# EAGLE board Tilt-A-Whirl_RPI-1031 Panel v12 (EAGLE 6.4), part 1 of 3
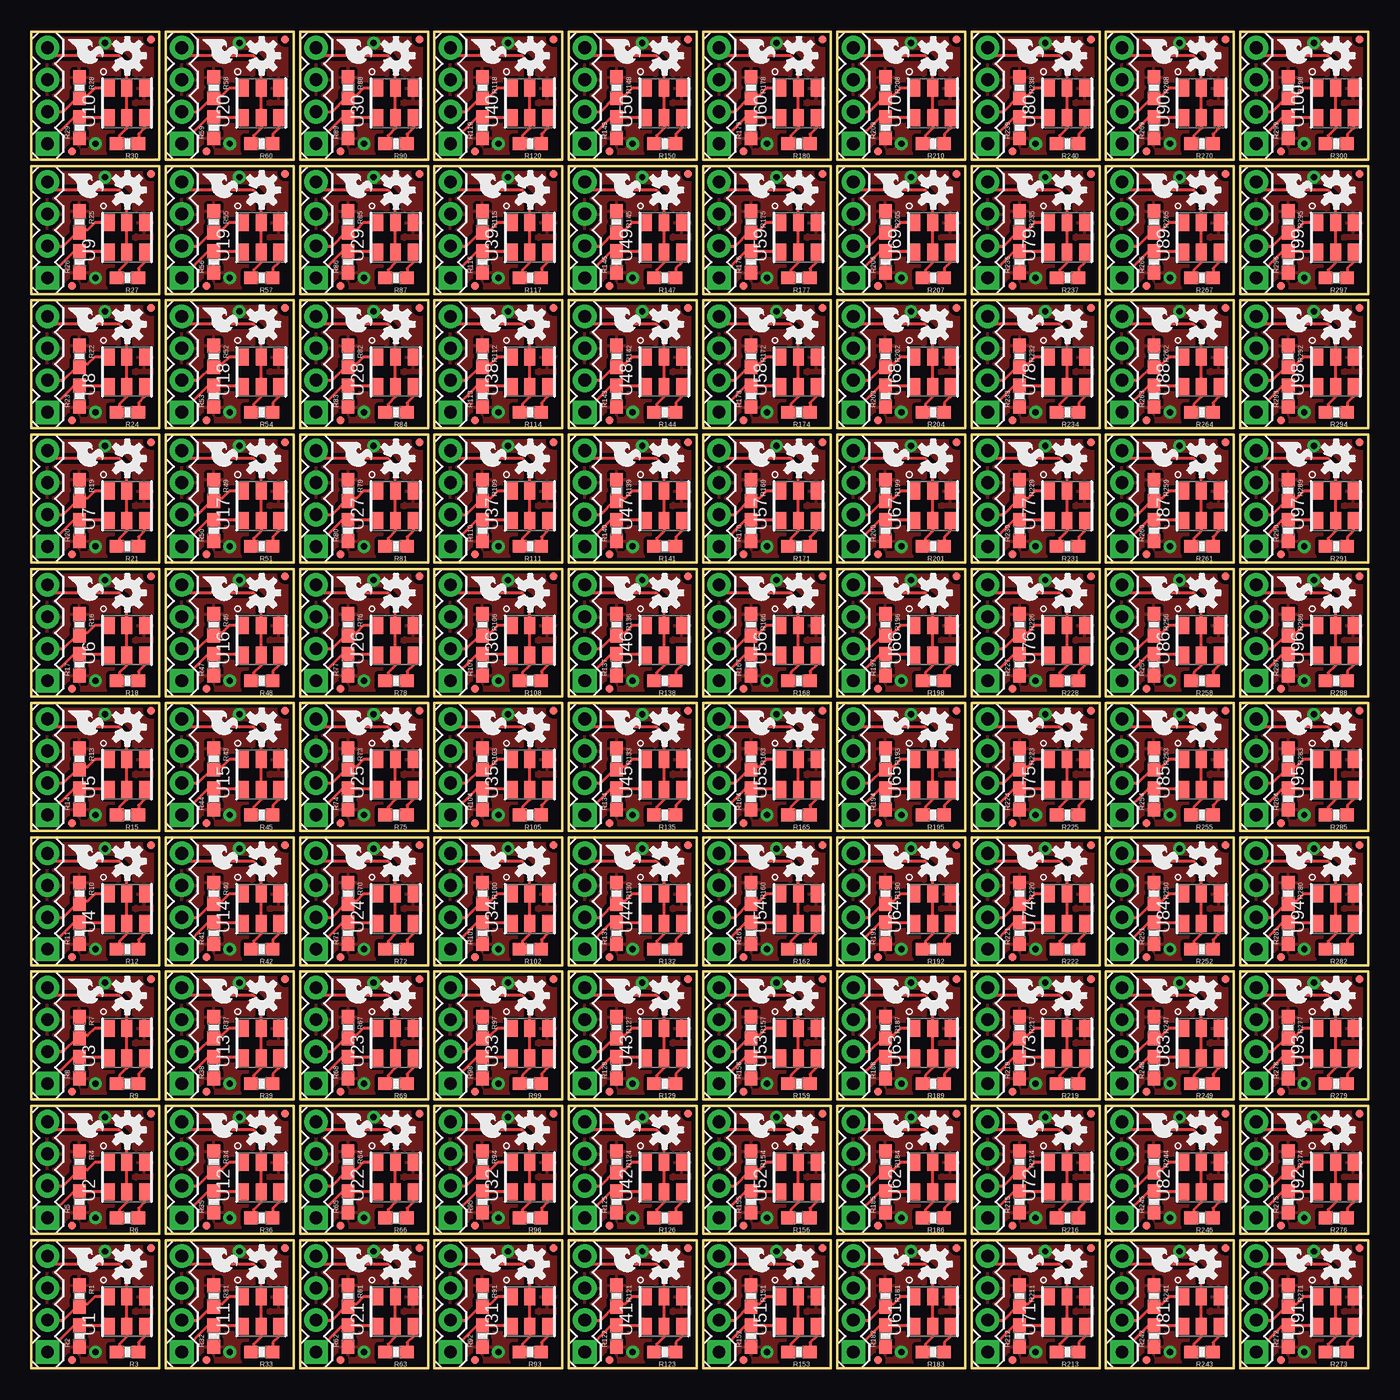
[diagram p0: board, top side]
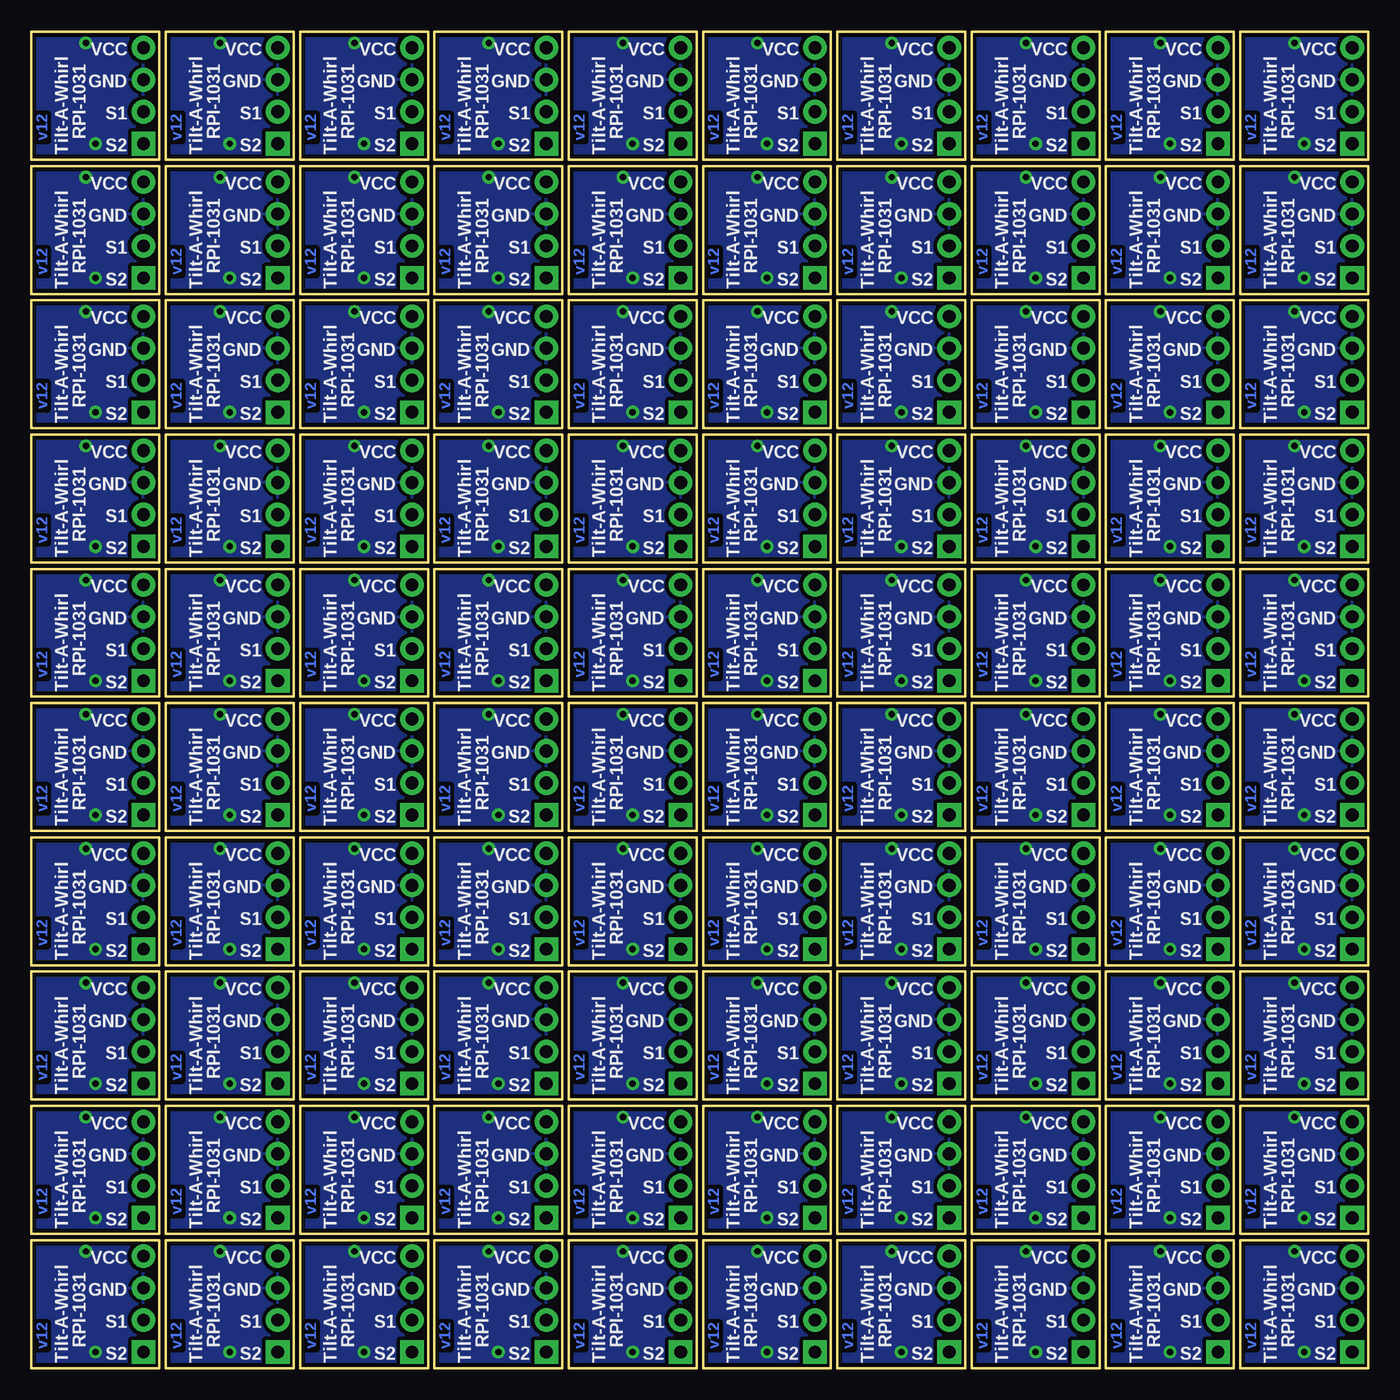
[diagram p1: board, bottom side, seen from below]

Size 106.17 x 106.17 mm. Coordinates in mm from the lower left corner, seen from the top.
Outline: 400 segments
Copper layers (1*16): Top 0.035mm / dielectric 1.5mm / Bottom 0.035mm
Design rules "SparkFun *": minimum track width 8mil, minimum drill 20mil, track to track 8mil, track to pad 8mil, pad to pad 8mil, via to via 8mil, smd to smd 8mil, copper to edge 8mil, drill to drill 8mil, minimum pad ring 12mil, minimum via ring 10mil, stop-mask expansion 4mil, vias tented up to drill 20mil, thermal gap 10mil

## Footprints (pad centres in the part's own frame; a part is rotated, then mirrored left to right if it is on the bottom)
1X04 = drill 1.016 pad 1.88 square: 1 0,0 | drill 1.016 pad 1.88: 2 2.54,0; 3 5.08,0; 4 7.62,0
FIDUCIAL-1X2.5 = smd 0.635 x 0.635: 1 0,0
0603-RES = smd 1.1 x 1: 1 -0.85,0; 2 0.85,0
RPI-1031 = smd 1.35 x 0.85: 1 1.22,1.445; 2 1.22,0.045; 3 1.22,-1.355; 4 -1.13,1.445; 5 -1.13,0.045; 6 -1.13,-1.355

## Placement (x,y rotation side)
JP1  [1X04]  1.27,1.27 90 top
JP2  FIDUCIAL1X2.5  [FIDUCIAL-1X2.5]  9.47,9.55 0 top
JP3  FIDUCIAL1X2.5  [FIDUCIAL-1X2.5]  3.23,0.64 0 top
JP4  LOGO-SFESK  [SFE-LOGO-FLAME]  2.92,9.53 270 top
JP5  LOGO-SFESK  [SFE-LOGO-FLAME]  2.92,20.19 270 top
JP6  [1X04]  1.27,11.94 90 top
JP7  FIDUCIAL1X2.5  [FIDUCIAL-1X2.5]  9.47,20.22 0 top
JP8  FIDUCIAL1X2.5  [FIDUCIAL-1X2.5]  3.23,11.3 0 top
JP9  LOGO-SFESK  [SFE-LOGO-FLAME]  2.92,30.86 270 top
JP10  [1X04]  1.27,22.61 90 top
JP11  FIDUCIAL1X2.5  [FIDUCIAL-1X2.5]  9.47,30.89 0 top
JP12  FIDUCIAL1X2.5  [FIDUCIAL-1X2.5]  3.23,21.97 0 top
JP13  LOGO-SFESK  [SFE-LOGO-FLAME]  2.92,41.53 270 top
JP14  [1X04]  1.27,33.27 90 top
JP15  FIDUCIAL1X2.5  [FIDUCIAL-1X2.5]  9.47,41.55 0 top
JP16  FIDUCIAL1X2.5  [FIDUCIAL-1X2.5]  3.23,32.64 0 top
JP17  LOGO-SFESK  [SFE-LOGO-FLAME]  2.92,52.2 270 top
JP18  [1X04]  1.27,43.94 90 top
JP19  FIDUCIAL1X2.5  [FIDUCIAL-1X2.5]  9.47,52.22 0 top
JP20  FIDUCIAL1X2.5  [FIDUCIAL-1X2.5]  3.23,43.31 0 top
JP21  LOGO-SFESK  [SFE-LOGO-FLAME]  2.92,62.87 270 top
JP22  [1X04]  1.27,54.61 90 top
JP23  FIDUCIAL1X2.5  [FIDUCIAL-1X2.5]  9.47,62.89 0 top
JP24  FIDUCIAL1X2.5  [FIDUCIAL-1X2.5]  3.23,53.98 0 top
JP25  LOGO-SFESK  [SFE-LOGO-FLAME]  2.92,73.53 270 top
JP26  [1X04]  1.27,65.28 90 top
JP27  FIDUCIAL1X2.5  [FIDUCIAL-1X2.5]  9.47,73.56 0 top
JP28  FIDUCIAL1X2.5  [FIDUCIAL-1X2.5]  3.23,64.64 0 top
JP29  LOGO-SFESK  [SFE-LOGO-FLAME]  2.92,84.2 270 top
JP30  [1X04]  1.27,75.95 90 top
JP31  FIDUCIAL1X2.5  [FIDUCIAL-1X2.5]  9.47,84.23 0 top
JP32  FIDUCIAL1X2.5  [FIDUCIAL-1X2.5]  3.23,75.31 0 top
JP33  LOGO-SFESK  [SFE-LOGO-FLAME]  2.92,94.87 270 top
JP34  [1X04]  1.27,86.61 90 top
JP35  FIDUCIAL1X2.5  [FIDUCIAL-1X2.5]  9.47,94.89 0 top
JP36  FIDUCIAL1X2.5  [FIDUCIAL-1X2.5]  3.23,85.98 0 top
JP37  LOGO-SFESK  [SFE-LOGO-FLAME]  2.92,105.54 270 top
JP38  [1X04]  1.27,97.28 90 top
JP39  FIDUCIAL1X2.5  [FIDUCIAL-1X2.5]  9.47,105.56 0 top
JP40  FIDUCIAL1X2.5  [FIDUCIAL-1X2.5]  3.23,96.65 0 top
JP41  LOGO-SFESK  [SFE-LOGO-FLAME]  13.59,9.53 270 top
JP42  [1X04]  11.94,1.27 90 top
JP43  FIDUCIAL1X2.5  [FIDUCIAL-1X2.5]  20.14,9.55 0 top
JP44  FIDUCIAL1X2.5  [FIDUCIAL-1X2.5]  13.89,0.64 0 top
JP45  LOGO-SFESK  [SFE-LOGO-FLAME]  13.59,20.19 270 top
JP46  [1X04]  11.94,11.94 90 top
JP47  FIDUCIAL1X2.5  [FIDUCIAL-1X2.5]  20.14,20.22 0 top
JP48  FIDUCIAL1X2.5  [FIDUCIAL-1X2.5]  13.89,11.3 0 top
JP49  LOGO-SFESK  [SFE-LOGO-FLAME]  13.59,30.86 270 top
JP50  [1X04]  11.94,22.61 90 top
JP51  FIDUCIAL1X2.5  [FIDUCIAL-1X2.5]  20.14,30.89 0 top
JP52  FIDUCIAL1X2.5  [FIDUCIAL-1X2.5]  13.89,21.97 0 top
JP53  LOGO-SFESK  [SFE-LOGO-FLAME]  13.59,41.53 270 top
JP54  [1X04]  11.94,33.27 90 top
JP55  FIDUCIAL1X2.5  [FIDUCIAL-1X2.5]  20.14,41.55 0 top
JP56  FIDUCIAL1X2.5  [FIDUCIAL-1X2.5]  13.89,32.64 0 top
JP57  LOGO-SFESK  [SFE-LOGO-FLAME]  13.59,52.2 270 top
JP58  [1X04]  11.94,43.94 90 top
JP59  FIDUCIAL1X2.5  [FIDUCIAL-1X2.5]  20.14,52.22 0 top
JP60  FIDUCIAL1X2.5  [FIDUCIAL-1X2.5]  13.89,43.31 0 top
JP61  LOGO-SFESK  [SFE-LOGO-FLAME]  13.59,62.87 270 top
JP62  [1X04]  11.94,54.61 90 top
JP63  FIDUCIAL1X2.5  [FIDUCIAL-1X2.5]  20.14,62.89 0 top
JP64  FIDUCIAL1X2.5  [FIDUCIAL-1X2.5]  13.89,53.98 0 top
JP65  LOGO-SFESK  [SFE-LOGO-FLAME]  13.59,73.53 270 top
JP66  [1X04]  11.94,65.28 90 top
JP67  FIDUCIAL1X2.5  [FIDUCIAL-1X2.5]  20.14,73.56 0 top
JP68  FIDUCIAL1X2.5  [FIDUCIAL-1X2.5]  13.89,64.64 0 top
JP69  LOGO-SFESK  [SFE-LOGO-FLAME]  13.59,84.2 270 top
JP70  [1X04]  11.94,75.95 90 top
JP71  FIDUCIAL1X2.5  [FIDUCIAL-1X2.5]  20.14,84.23 0 top
JP72  FIDUCIAL1X2.5  [FIDUCIAL-1X2.5]  13.89,75.31 0 top
JP73  LOGO-SFESK  [SFE-LOGO-FLAME]  13.59,94.87 270 top
JP74  [1X04]  11.94,86.61 90 top
JP75  FIDUCIAL1X2.5  [FIDUCIAL-1X2.5]  20.14,94.89 0 top
JP76  FIDUCIAL1X2.5  [FIDUCIAL-1X2.5]  13.89,85.98 0 top
JP77  LOGO-SFESK  [SFE-LOGO-FLAME]  13.59,105.54 270 top
JP78  [1X04]  11.94,97.28 90 top
JP79  FIDUCIAL1X2.5  [FIDUCIAL-1X2.5]  20.14,105.56 0 top
JP80  FIDUCIAL1X2.5  [FIDUCIAL-1X2.5]  13.89,96.65 0 top
JP81  LOGO-SFESK  [SFE-LOGO-FLAME]  24.26,9.53 270 top
JP82  [1X04]  22.61,1.27 90 top
JP83  FIDUCIAL1X2.5  [FIDUCIAL-1X2.5]  30.81,9.55 0 top
JP84  FIDUCIAL1X2.5  [FIDUCIAL-1X2.5]  24.56,0.64 0 top
JP85  LOGO-SFESK  [SFE-LOGO-FLAME]  24.26,20.19 270 top
JP86  [1X04]  22.61,11.94 90 top
JP87  FIDUCIAL1X2.5  [FIDUCIAL-1X2.5]  30.81,20.22 0 top
JP88  FIDUCIAL1X2.5  [FIDUCIAL-1X2.5]  24.56,11.3 0 top
JP89  LOGO-SFESK  [SFE-LOGO-FLAME]  24.26,30.86 270 top
JP90  [1X04]  22.61,22.61 90 top
JP91  FIDUCIAL1X2.5  [FIDUCIAL-1X2.5]  30.81,30.89 0 top
JP92  FIDUCIAL1X2.5  [FIDUCIAL-1X2.5]  24.56,21.97 0 top
JP93  LOGO-SFESK  [SFE-LOGO-FLAME]  24.26,41.53 270 top
JP94  [1X04]  22.61,33.27 90 top
JP95  FIDUCIAL1X2.5  [FIDUCIAL-1X2.5]  30.81,41.55 0 top
JP96  FIDUCIAL1X2.5  [FIDUCIAL-1X2.5]  24.56,32.64 0 top
JP97  LOGO-SFESK  [SFE-LOGO-FLAME]  24.26,52.2 270 top
JP98  [1X04]  22.61,43.94 90 top
JP99  FIDUCIAL1X2.5  [FIDUCIAL-1X2.5]  30.81,52.22 0 top
JP100  FIDUCIAL1X2.5  [FIDUCIAL-1X2.5]  24.56,43.31 0 top
JP101  LOGO-SFESK  [SFE-LOGO-FLAME]  24.26,62.87 270 top
JP102  [1X04]  22.61,54.61 90 top
JP103  FIDUCIAL1X2.5  [FIDUCIAL-1X2.5]  30.81,62.89 0 top
JP104  FIDUCIAL1X2.5  [FIDUCIAL-1X2.5]  24.56,53.98 0 top
JP105  LOGO-SFESK  [SFE-LOGO-FLAME]  24.26,73.53 270 top
JP106  [1X04]  22.61,65.28 90 top
JP107  FIDUCIAL1X2.5  [FIDUCIAL-1X2.5]  30.81,73.56 0 top
JP108  FIDUCIAL1X2.5  [FIDUCIAL-1X2.5]  24.56,64.64 0 top
JP109  LOGO-SFESK  [SFE-LOGO-FLAME]  24.26,84.2 270 top
JP110  [1X04]  22.61,75.95 90 top
JP111  FIDUCIAL1X2.5  [FIDUCIAL-1X2.5]  30.81,84.23 0 top
JP112  FIDUCIAL1X2.5  [FIDUCIAL-1X2.5]  24.56,75.31 0 top
JP113  LOGO-SFESK  [SFE-LOGO-FLAME]  24.26,94.87 270 top
JP114  [1X04]  22.61,86.61 90 top
JP115  FIDUCIAL1X2.5  [FIDUCIAL-1X2.5]  30.81,94.89 0 top
JP116  FIDUCIAL1X2.5  [FIDUCIAL-1X2.5]  24.56,85.98 0 top
JP117  LOGO-SFESK  [SFE-LOGO-FLAME]  24.26,105.54 270 top
JP118  [1X04]  22.61,97.28 90 top
JP119  FIDUCIAL1X2.5  [FIDUCIAL-1X2.5]  30.81,105.56 0 top
JP120  FIDUCIAL1X2.5  [FIDUCIAL-1X2.5]  24.56,96.65 0 top
JP121  LOGO-SFESK  [SFE-LOGO-FLAME]  34.92,9.53 270 top
JP122  [1X04]  33.27,1.27 90 top
JP123  FIDUCIAL1X2.5  [FIDUCIAL-1X2.5]  41.48,9.55 0 top
JP124  FIDUCIAL1X2.5  [FIDUCIAL-1X2.5]  35.23,0.64 0 top
JP125  LOGO-SFESK  [SFE-LOGO-FLAME]  34.92,20.19 270 top
JP126  [1X04]  33.27,11.94 90 top
JP127  FIDUCIAL1X2.5  [FIDUCIAL-1X2.5]  41.48,20.22 0 top
JP128  FIDUCIAL1X2.5  [FIDUCIAL-1X2.5]  35.23,11.3 0 top
JP129  LOGO-SFESK  [SFE-LOGO-FLAME]  34.92,30.86 270 top
JP130  [1X04]  33.27,22.61 90 top
JP131  FIDUCIAL1X2.5  [FIDUCIAL-1X2.5]  41.48,30.89 0 top
JP132  FIDUCIAL1X2.5  [FIDUCIAL-1X2.5]  35.23,21.97 0 top
JP133  LOGO-SFESK  [SFE-LOGO-FLAME]  34.92,41.53 270 top
JP134  [1X04]  33.27,33.27 90 top
JP135  FIDUCIAL1X2.5  [FIDUCIAL-1X2.5]  41.48,41.55 0 top
JP136  FIDUCIAL1X2.5  [FIDUCIAL-1X2.5]  35.23,32.64 0 top
JP137  LOGO-SFESK  [SFE-LOGO-FLAME]  34.92,52.2 270 top
JP138  [1X04]  33.27,43.94 90 top
JP139  FIDUCIAL1X2.5  [FIDUCIAL-1X2.5]  41.48,52.22 0 top
JP140  FIDUCIAL1X2.5  [FIDUCIAL-1X2.5]  35.23,43.31 0 top
JP141  LOGO-SFESK  [SFE-LOGO-FLAME]  34.92,62.87 270 top
JP142  [1X04]  33.27,54.61 90 top
JP143  FIDUCIAL1X2.5  [FIDUCIAL-1X2.5]  41.48,62.89 0 top
JP144  FIDUCIAL1X2.5  [FIDUCIAL-1X2.5]  35.23,53.98 0 top
JP145  LOGO-SFESK  [SFE-LOGO-FLAME]  34.92,73.53 270 top
JP146  [1X04]  33.27,65.28 90 top
JP147  FIDUCIAL1X2.5  [FIDUCIAL-1X2.5]  41.48,73.56 0 top
JP148  FIDUCIAL1X2.5  [FIDUCIAL-1X2.5]  35.23,64.64 0 top
JP149  LOGO-SFESK  [SFE-LOGO-FLAME]  34.92,84.2 270 top
JP150  [1X04]  33.27,75.95 90 top
JP151  FIDUCIAL1X2.5  [FIDUCIAL-1X2.5]  41.48,84.23 0 top
JP152  FIDUCIAL1X2.5  [FIDUCIAL-1X2.5]  35.23,75.31 0 top
JP153  LOGO-SFESK  [SFE-LOGO-FLAME]  34.92,94.87 270 top
JP154  [1X04]  33.27,86.61 90 top
JP155  FIDUCIAL1X2.5  [FIDUCIAL-1X2.5]  41.48,94.89 0 top
JP156  FIDUCIAL1X2.5  [FIDUCIAL-1X2.5]  35.23,85.98 0 top
JP157  LOGO-SFESK  [SFE-LOGO-FLAME]  34.92,105.54 270 top
JP158  [1X04]  33.27,97.28 90 top
JP159  FIDUCIAL1X2.5  [FIDUCIAL-1X2.5]  41.48,105.56 0 top
JP160  FIDUCIAL1X2.5  [FIDUCIAL-1X2.5]  35.23,96.65 0 top
JP161  LOGO-SFESK  [SFE-LOGO-FLAME]  45.59,9.53 270 top
JP162  [1X04]  43.94,1.27 90 top
JP163  FIDUCIAL1X2.5  [FIDUCIAL-1X2.5]  52.15,9.55 0 top
JP164  FIDUCIAL1X2.5  [FIDUCIAL-1X2.5]  45.9,0.64 0 top
JP165  LOGO-SFESK  [SFE-LOGO-FLAME]  45.59,20.19 270 top
JP166  [1X04]  43.94,11.94 90 top
JP167  FIDUCIAL1X2.5  [FIDUCIAL-1X2.5]  52.15,20.22 0 top
JP168  FIDUCIAL1X2.5  [FIDUCIAL-1X2.5]  45.9,11.3 0 top
JP169  LOGO-SFESK  [SFE-LOGO-FLAME]  45.59,30.86 270 top
JP170  [1X04]  43.94,22.61 90 top
JP171  FIDUCIAL1X2.5  [FIDUCIAL-1X2.5]  52.15,30.89 0 top
JP172  FIDUCIAL1X2.5  [FIDUCIAL-1X2.5]  45.9,21.97 0 top
JP173  LOGO-SFESK  [SFE-LOGO-FLAME]  45.59,41.53 270 top
JP174  [1X04]  43.94,33.27 90 top
JP175  FIDUCIAL1X2.5  [FIDUCIAL-1X2.5]  52.15,41.55 0 top
JP176  FIDUCIAL1X2.5  [FIDUCIAL-1X2.5]  45.9,32.64 0 top
JP177  LOGO-SFESK  [SFE-LOGO-FLAME]  45.59,52.2 270 top
JP178  [1X04]  43.94,43.94 90 top
JP179  FIDUCIAL1X2.5  [FIDUCIAL-1X2.5]  52.15,52.22 0 top
JP180  FIDUCIAL1X2.5  [FIDUCIAL-1X2.5]  45.9,43.31 0 top
JP181  LOGO-SFESK  [SFE-LOGO-FLAME]  45.59,62.87 270 top
JP182  [1X04]  43.94,54.61 90 top
JP183  FIDUCIAL1X2.5  [FIDUCIAL-1X2.5]  52.15,62.89 0 top
JP184  FIDUCIAL1X2.5  [FIDUCIAL-1X2.5]  45.9,53.98 0 top
JP185  LOGO-SFESK  [SFE-LOGO-FLAME]  45.59,73.53 270 top
JP186  [1X04]  43.94,65.28 90 top
JP187  FIDUCIAL1X2.5  [FIDUCIAL-1X2.5]  52.15,73.56 0 top
JP188  FIDUCIAL1X2.5  [FIDUCIAL-1X2.5]  45.9,64.64 0 top
JP189  LOGO-SFESK  [SFE-LOGO-FLAME]  45.59,84.2 270 top
JP190  [1X04]  43.94,75.95 90 top
JP191  FIDUCIAL1X2.5  [FIDUCIAL-1X2.5]  52.15,84.23 0 top
JP192  FIDUCIAL1X2.5  [FIDUCIAL-1X2.5]  45.9,75.31 0 top
JP193  LOGO-SFESK  [SFE-LOGO-FLAME]  45.59,94.87 270 top
JP194  [1X04]  43.94,86.61 90 top
JP195  FIDUCIAL1X2.5  [FIDUCIAL-1X2.5]  52.15,94.89 0 top
JP196  FIDUCIAL1X2.5  [FIDUCIAL-1X2.5]  45.9,85.98 0 top
JP197  LOGO-SFESK  [SFE-LOGO-FLAME]  45.59,105.54 270 top
JP198  [1X04]  43.94,97.28 90 top
JP199  FIDUCIAL1X2.5  [FIDUCIAL-1X2.5]  52.15,105.56 0 top
JP200  FIDUCIAL1X2.5  [FIDUCIAL-1X2.5]  45.9,96.65 0 top
JP201  LOGO-SFESK  [SFE-LOGO-FLAME]  56.26,9.53 270 top
JP202  [1X04]  54.61,1.27 90 top
JP203  FIDUCIAL1X2.5  [FIDUCIAL-1X2.5]  62.81,9.55 0 top
JP204  FIDUCIAL1X2.5  [FIDUCIAL-1X2.5]  56.57,0.64 0 top
JP205  LOGO-SFESK  [SFE-LOGO-FLAME]  56.26,20.19 270 top
JP206  [1X04]  54.61,11.94 90 top
JP207  FIDUCIAL1X2.5  [FIDUCIAL-1X2.5]  62.81,20.22 0 top
JP208  FIDUCIAL1X2.5  [FIDUCIAL-1X2.5]  56.57,11.3 0 top
JP209  LOGO-SFESK  [SFE-LOGO-FLAME]  56.26,30.86 270 top
JP210  [1X04]  54.61,22.61 90 top
JP211  FIDUCIAL1X2.5  [FIDUCIAL-1X2.5]  62.81,30.89 0 top
JP212  FIDUCIAL1X2.5  [FIDUCIAL-1X2.5]  56.57,21.97 0 top
JP213  LOGO-SFESK  [SFE-LOGO-FLAME]  56.26,41.53 270 top
JP214  [1X04]  54.61,33.27 90 top
JP215  FIDUCIAL1X2.5  [FIDUCIAL-1X2.5]  62.81,41.55 0 top
JP216  FIDUCIAL1X2.5  [FIDUCIAL-1X2.5]  56.57,32.64 0 top
JP217  LOGO-SFESK  [SFE-LOGO-FLAME]  56.26,52.2 270 top
JP218  [1X04]  54.61,43.94 90 top
JP219  FIDUCIAL1X2.5  [FIDUCIAL-1X2.5]  62.81,52.22 0 top
JP220  FIDUCIAL1X2.5  [FIDUCIAL-1X2.5]  56.57,43.31 0 top
JP221  LOGO-SFESK  [SFE-LOGO-FLAME]  56.26,62.87 270 top
JP222  [1X04]  54.61,54.61 90 top
JP223  FIDUCIAL1X2.5  [FIDUCIAL-1X2.5]  62.81,62.89 0 top
JP224  FIDUCIAL1X2.5  [FIDUCIAL-1X2.5]  56.57,53.98 0 top
JP225  LOGO-SFESK  [SFE-LOGO-FLAME]  56.26,73.53 270 top
JP226  [1X04]  54.61,65.28 90 top
JP227  FIDUCIAL1X2.5  [FIDUCIAL-1X2.5]  62.81,73.56 0 top
JP228  FIDUCIAL1X2.5  [FIDUCIAL-1X2.5]  56.57,64.64 0 top
JP229  LOGO-SFESK  [SFE-LOGO-FLAME]  56.26,84.2 270 top
JP230  [1X04]  54.61,75.95 90 top
JP231  FIDUCIAL1X2.5  [FIDUCIAL-1X2.5]  62.81,84.23 0 top
JP232  FIDUCIAL1X2.5  [FIDUCIAL-1X2.5]  56.57,75.31 0 top
JP233  LOGO-SFESK  [SFE-LOGO-FLAME]  56.26,94.87 270 top
JP234  [1X04]  54.61,86.61 90 top
JP235  FIDUCIAL1X2.5  [FIDUCIAL-1X2.5]  62.81,94.89 0 top
JP236  FIDUCIAL1X2.5  [FIDUCIAL-1X2.5]  56.57,85.98 0 top
JP237  LOGO-SFESK  [SFE-LOGO-FLAME]  56.26,105.54 270 top
JP238  [1X04]  54.61,97.28 90 top
JP239  FIDUCIAL1X2.5  [FIDUCIAL-1X2.5]  62.81,105.56 0 top
JP240  FIDUCIAL1X2.5  [FIDUCIAL-1X2.5]  56.57,96.65 0 top
JP241  LOGO-SFESK  [SFE-LOGO-FLAME]  66.93,9.53 270 top
JP242  [1X04]  65.28,1.27 90 top
JP243  FIDUCIAL1X2.5  [FIDUCIAL-1X2.5]  73.48,9.55 0 top
JP244  FIDUCIAL1X2.5  [FIDUCIAL-1X2.5]  67.23,0.64 0 top
JP245  LOGO-SFESK  [SFE-LOGO-FLAME]  66.93,20.19 270 top
JP246  [1X04]  65.28,11.94 90 top
JP247  FIDUCIAL1X2.5  [FIDUCIAL-1X2.5]  73.48,20.22 0 top
JP248  FIDUCIAL1X2.5  [FIDUCIAL-1X2.5]  67.23,11.3 0 top
JP249  LOGO-SFESK  [SFE-LOGO-FLAME]  66.93,30.86 270 top
JP250  [1X04]  65.28,22.61 90 top
JP251  FIDUCIAL1X2.5  [FIDUCIAL-1X2.5]  73.48,30.89 0 top
JP252  FIDUCIAL1X2.5  [FIDUCIAL-1X2.5]  67.23,21.97 0 top
JP253  LOGO-SFESK  [SFE-LOGO-FLAME]  66.93,41.53 270 top
JP254  [1X04]  65.28,33.27 90 top
JP255  FIDUCIAL1X2.5  [FIDUCIAL-1X2.5]  73.48,41.55 0 top
JP256  FIDUCIAL1X2.5  [FIDUCIAL-1X2.5]  67.23,32.64 0 top
JP257  LOGO-SFESK  [SFE-LOGO-FLAME]  66.93,52.2 270 top
JP258  [1X04]  65.28,43.94 90 top
JP259  FIDUCIAL1X2.5  [FIDUCIAL-1X2.5]  73.48,52.22 0 top
JP260  FIDUCIAL1X2.5  [FIDUCIAL-1X2.5]  67.23,43.31 0 top
JP261  LOGO-SFESK  [SFE-LOGO-FLAME]  66.93,62.87 270 top
JP262  [1X04]  65.28,54.61 90 top
JP263  FIDUCIAL1X2.5  [FIDUCIAL-1X2.5]  73.48,62.89 0 top
JP264  FIDUCIAL1X2.5  [FIDUCIAL-1X2.5]  67.23,53.98 0 top
JP265  LOGO-SFESK  [SFE-LOGO-FLAME]  66.93,73.53 270 top
JP266  [1X04]  65.28,65.28 90 top
JP267  FIDUCIAL1X2.5  [FIDUCIAL-1X2.5]  73.48,73.56 0 top
JP268  FIDUCIAL1X2.5  [FIDUCIAL-1X2.5]  67.23,64.64 0 top
JP269  LOGO-SFESK  [SFE-LOGO-FLAME]  66.93,84.2 270 top
JP270  [1X04]  65.28,75.95 90 top
JP271  FIDUCIAL1X2.5  [FIDUCIAL-1X2.5]  73.48,84.23 0 top
JP272  FIDUCIAL1X2.5  [FIDUCIAL-1X2.5]  67.23,75.31 0 top
JP273  LOGO-SFESK  [SFE-LOGO-FLAME]  66.93,94.87 270 top
JP274  [1X04]  65.28,86.61 90 top
JP275  FIDUCIAL1X2.5  [FIDUCIAL-1X2.5]  73.48,94.89 0 top
JP276  FIDUCIAL1X2.5  [FIDUCIAL-1X2.5]  67.23,85.98 0 top
JP277  LOGO-SFESK  [SFE-LOGO-FLAME]  66.93,105.54 270 top
JP278  [1X04]  65.28,97.28 90 top
JP279  FIDUCIAL1X2.5  [FIDUCIAL-1X2.5]  73.48,105.56 0 top
JP280  FIDUCIAL1X2.5  [FIDUCIAL-1X2.5]  67.23,96.65 0 top
JP281  LOGO-SFESK  [SFE-LOGO-FLAME]  77.6,9.53 270 top
JP282  [1X04]  75.95,1.27 90 top
JP283  FIDUCIAL1X2.5  [FIDUCIAL-1X2.5]  84.15,9.55 0 top
JP284  FIDUCIAL1X2.5  [FIDUCIAL-1X2.5]  77.9,0.64 0 top
JP285  LOGO-SFESK  [SFE-LOGO-FLAME]  77.6,20.19 270 top
JP286  [1X04]  75.95,11.94 90 top
JP287  FIDUCIAL1X2.5  [FIDUCIAL-1X2.5]  84.15,20.22 0 top
JP288  FIDUCIAL1X2.5  [FIDUCIAL-1X2.5]  77.9,11.3 0 top
JP289  LOGO-SFESK  [SFE-LOGO-FLAME]  77.6,30.86 270 top
JP290  [1X04]  75.95,22.61 90 top
JP291  FIDUCIAL1X2.5  [FIDUCIAL-1X2.5]  84.15,30.89 0 top
JP292  FIDUCIAL1X2.5  [FIDUCIAL-1X2.5]  77.9,21.97 0 top
JP293  LOGO-SFESK  [SFE-LOGO-FLAME]  77.6,41.53 270 top
JP294  [1X04]  75.95,33.27 90 top
JP295  FIDUCIAL1X2.5  [FIDUCIAL-1X2.5]  84.15,41.55 0 top
JP296  FIDUCIAL1X2.5  [FIDUCIAL-1X2.5]  77.9,32.64 0 top
JP297  LOGO-SFESK  [SFE-LOGO-FLAME]  77.6,52.2 270 top
JP298  [1X04]  75.95,43.94 90 top
JP299  FIDUCIAL1X2.5  [FIDUCIAL-1X2.5]  84.15,52.22 0 top
JP300  FIDUCIAL1X2.5  [FIDUCIAL-1X2.5]  77.9,43.31 0 top
JP301  LOGO-SFESK  [SFE-LOGO-FLAME]  77.6,62.87 270 top
JP302  [1X04]  75.95,54.61 90 top
JP303  FIDUCIAL1X2.5  [FIDUCIAL-1X2.5]  84.15,62.89 0 top
JP304  FIDUCIAL1X2.5  [FIDUCIAL-1X2.5]  77.9,53.98 0 top
JP305  LOGO-SFESK  [SFE-LOGO-FLAME]  77.6,73.53 270 top
JP306  [1X04]  75.95,65.28 90 top
JP307  FIDUCIAL1X2.5  [FIDUCIAL-1X2.5]  84.15,73.56 0 top
JP308  FIDUCIAL1X2.5  [FIDUCIAL-1X2.5]  77.9,64.64 0 top
JP309  LOGO-SFESK  [SFE-LOGO-FLAME]  77.6,84.2 270 top
JP310  [1X04]  75.95,75.95 90 top
JP311  FIDUCIAL1X2.5  [FIDUCIAL-1X2.5]  84.15,84.23 0 top
JP312  FIDUCIAL1X2.5  [FIDUCIAL-1X2.5]  77.9,75.31 0 top
JP313  LOGO-SFESK  [SFE-LOGO-FLAME]  77.6,94.87 270 top
JP314  [1X04]  75.95,86.61 90 top
JP315  FIDUCIAL1X2.5  [FIDUCIAL-1X2.5]  84.15,94.89 0 top
JP316  FIDUCIAL1X2.5  [FIDUCIAL-1X2.5]  77.9,85.98 0 top
JP317  LOGO-SFESK  [SFE-LOGO-FLAME]  77.6,105.54 270 top
JP318  [1X04]  75.95,97.28 90 top
JP319  FIDUCIAL1X2.5  [FIDUCIAL-1X2.5]  84.15,105.56 0 top
JP320  FIDUCIAL1X2.5  [FIDUCIAL-1X2.5]  77.9,96.65 0 top
JP321  LOGO-SFESK  [SFE-LOGO-FLAME]  88.27,9.53 270 top
JP322  [1X04]  86.61,1.27 90 top
JP323  FIDUCIAL1X2.5  [FIDUCIAL-1X2.5]  94.82,9.55 0 top
JP324  FIDUCIAL1X2.5  [FIDUCIAL-1X2.5]  88.57,0.64 0 top
JP325  LOGO-SFESK  [SFE-LOGO-FLAME]  88.27,20.19 270 top
JP326  [1X04]  86.61,11.94 90 top
JP327  FIDUCIAL1X2.5  [FIDUCIAL-1X2.5]  94.82,20.22 0 top
JP328  FIDUCIAL1X2.5  [FIDUCIAL-1X2.5]  88.57,11.3 0 top
JP329  LOGO-SFESK  [SFE-LOGO-FLAME]  88.27,30.86 270 top
JP330  [1X04]  86.61,22.61 90 top
JP331  FIDUCIAL1X2.5  [FIDUCIAL-1X2.5]  94.82,30.89 0 top
JP332  FIDUCIAL1X2.5  [FIDUCIAL-1X2.5]  88.57,21.97 0 top
JP333  LOGO-SFESK  [SFE-LOGO-FLAME]  88.27,41.53 270 top
JP334  [1X04]  86.61,33.27 90 top
JP335  FIDUCIAL1X2.5  [FIDUCIAL-1X2.5]  94.82,41.55 0 top
JP336  FIDUCIAL1X2.5  [FIDUCIAL-1X2.5]  88.57,32.64 0 top
JP337  LOGO-SFESK  [SFE-LOGO-FLAME]  88.27,52.2 270 top
JP338  [1X04]  86.61,43.94 90 top
JP339  FIDUCIAL1X2.5  [FIDUCIAL-1X2.5]  94.82,52.22 0 top
JP340  FIDUCIAL1X2.5  [FIDUCIAL-1X2.5]  88.57,43.31 0 top
JP341  LOGO-SFESK  [SFE-LOGO-FLAME]  88.27,62.87 270 top
JP342  [1X04]  86.61,54.61 90 top
JP343  FIDUCIAL1X2.5  [FIDUCIAL-1X2.5]  94.82,62.89 0 top
JP344  FIDUCIAL1X2.5  [FIDUCIAL-1X2.5]  88.57,53.98 0 top
JP345  LOGO-SFESK  [SFE-LOGO-FLAME]  88.27,73.53 270 top
JP346  [1X04]  86.61,65.28 90 top
JP347  FIDUCIAL1X2.5  [FIDUCIAL-1X2.5]  94.82,73.56 0 top
JP348  FIDUCIAL1X2.5  [FIDUCIAL-1X2.5]  88.57,64.64 0 top
JP349  LOGO-SFESK  [SFE-LOGO-FLAME]  88.27,84.2 270 top
JP350  [1X04]  86.61,75.95 90 top
JP351  FIDUCIAL1X2.5  [FIDUCIAL-1X2.5]  94.82,84.23 0 top
JP352  FIDUCIAL1X2.5  [FIDUCIAL-1X2.5]  88.57,75.31 0 top
JP353  LOGO-SFESK  [SFE-LOGO-FLAME]  88.27,94.87 270 top
JP354  [1X04]  86.61,86.61 90 top
JP355  FIDUCIAL1X2.5  [FIDUCIAL-1X2.5]  94.82,94.89 0 top
JP356  FIDUCIAL1X2.5  [FIDUCIAL-1X2.5]  88.57,85.98 0 top
JP357  LOGO-SFESK  [SFE-LOGO-FLAME]  88.27,105.54 270 top
JP358  [1X04]  86.61,97.28 90 top
JP359  FIDUCIAL1X2.5  [FIDUCIAL-1X2.5]  94.82,105.56 0 top
JP360  FIDUCIAL1X2.5  [FIDUCIAL-1X2.5]  88.57,96.65 0 top
JP361  LOGO-SFESK  [SFE-LOGO-FLAME]  98.93,9.53 270 top
JP362  [1X04]  97.28,1.27 90 top
JP363  FIDUCIAL1X2.5  [FIDUCIAL-1X2.5]  105.49,9.55 0 top
JP364  FIDUCIAL1X2.5  [FIDUCIAL-1X2.5]  99.24,0.64 0 top
JP365  LOGO-SFESK  [SFE-LOGO-FLAME]  98.93,20.19 270 top
JP366  [1X04]  97.28,11.94 90 top
JP367  FIDUCIAL1X2.5  [FIDUCIAL-1X2.5]  105.49,20.22 0 top
JP368  FIDUCIAL1X2.5  [FIDUCIAL-1X2.5]  99.24,11.3 0 top
JP369  LOGO-SFESK  [SFE-LOGO-FLAME]  98.93,30.86 270 top
JP370  [1X04]  97.28,22.61 90 top
JP371  FIDUCIAL1X2.5  [FIDUCIAL-1X2.5]  105.49,30.89 0 top
JP372  FIDUCIAL1X2.5  [FIDUCIAL-1X2.5]  99.24,21.97 0 top
JP373  LOGO-SFESK  [SFE-LOGO-FLAME]  98.93,41.53 270 top
JP374  [1X04]  97.28,33.27 90 top
JP375  FIDUCIAL1X2.5  [FIDUCIAL-1X2.5]  105.49,41.55 0 top
JP376  FIDUCIAL1X2.5  [FIDUCIAL-1X2.5]  99.24,32.64 0 top
JP377  LOGO-SFESK  [SFE-LOGO-FLAME]  98.93,52.2 270 top
JP378  [1X04]  97.28,43.94 90 top
JP379  FIDUCIAL1X2.5  [FIDUCIAL-1X2.5]  105.49,52.22 0 top
JP380  FIDUCIAL1X2.5  [FIDUCIAL-1X2.5]  99.24,43.31 0 top
JP381  LOGO-SFESK  [SFE-LOGO-FLAME]  98.93,62.87 270 top
JP382  [1X04]  97.28,54.61 90 top
JP383  FIDUCIAL1X2.5  [FIDUCIAL-1X2.5]  105.49,62.89 0 top
JP384  FIDUCIAL1X2.5  [FIDUCIAL-1X2.5]  99.24,53.98 0 top
JP385  LOGO-SFESK  [SFE-LOGO-FLAME]  98.93,73.53 270 top
JP386  [1X04]  97.28,65.28 90 top
JP387  FIDUCIAL1X2.5  [FIDUCIAL-1X2.5]  105.49,73.56 0 top
JP388  FIDUCIAL1X2.5  [FIDUCIAL-1X2.5]  99.24,64.64 0 top
JP389  LOGO-SFESK  [SFE-LOGO-FLAME]  98.93,84.2 270 top
JP390  [1X04]  97.28,75.95 90 top
JP391  FIDUCIAL1X2.5  [FIDUCIAL-1X2.5]  105.49,84.23 0 top
JP392  FIDUCIAL1X2.5  [FIDUCIAL-1X2.5]  99.24,75.31 0 top
JP393  LOGO-SFESK  [SFE-LOGO-FLAME]  98.93,94.87 270 top
JP394  [1X04]  97.28,86.61 90 top
JP395  FIDUCIAL1X2.5  [FIDUCIAL-1X2.5]  105.49,94.89 0 top
JP396  FIDUCIAL1X2.5  [FIDUCIAL-1X2.5]  99.24,85.98 0 top
JP397  LOGO-SFESK  [SFE-LOGO-FLAME]  98.93,105.54 270 top
JP398  [1X04]  97.28,97.28 90 top
JP399  FIDUCIAL1X2.5  [FIDUCIAL-1X2.5]  105.49,105.56 0 top
JP400  FIDUCIAL1X2.5  [FIDUCIAL-1X2.5]  99.24,96.65 0 top
R1  22k  [0603-RES]  3.81,5.71 270 top
R2  22k  [0603-RES]  3.81,2.54 90 top
R3  240  [0603-RES]  7.62,1.27 180 top
R4  22k  [0603-RES]  3.81,16.38 270 top
R5  22k  [0603-RES]  3.81,13.21 90 top
R6  240  [0603-RES]  7.62,11.94 180 top
R7  22k  [0603-RES]  3.81,27.05 270 top
R8  22k  [0603-RES]  3.81,23.88 90 top
R9  240  [0603-RES]  7.62,22.61 180 top
R10  22k  [0603-RES]  3.81,37.72 270 top
R11  22k  [0603-RES]  3.81,34.54 90 top
R12  240  [0603-RES]  7.62,33.27 180 top
R13  22k  [0603-RES]  3.81,48.39 270 top
R14  22k  [0603-RES]  3.81,45.21 90 top
R15  240  [0603-RES]  7.62,43.94 180 top
R16  22k  [0603-RES]  3.81,59.05 270 top
R17  22k  [0603-RES]  3.81,55.88 90 top
R18  240  [0603-RES]  7.62,54.61 180 top
R19  22k  [0603-RES]  3.81,69.72 270 top
R20  22k  [0603-RES]  3.81,66.55 90 top
R21  240  [0603-RES]  7.62,65.28 180 top
R22  22k  [0603-RES]  3.81,80.39 270 top
R23  22k  [0603-RES]  3.81,77.22 90 top
R24  240  [0603-RES]  7.62,75.95 180 top
R25  22k  [0603-RES]  3.81,91.06 270 top
R26  22k  [0603-RES]  3.81,87.88 90 top
R27  240  [0603-RES]  7.62,86.61 180 top
R28  22k  [0603-RES]  3.81,101.73 270 top
R29  22k  [0603-RES]  3.81,98.55 90 top
R30  240  [0603-RES]  7.62,97.28 180 top
R31  22k  [0603-RES]  14.48,5.71 270 top
R32  22k  [0603-RES]  14.48,2.54 90 top
R33  240  [0603-RES]  18.29,1.27 180 top
R34  22k  [0603-RES]  14.48,16.38 270 top
R35  22k  [0603-RES]  14.48,13.21 90 top
R36  240  [0603-RES]  18.29,11.94 180 top
R37  22k  [0603-RES]  14.48,27.05 270 top
R38  22k  [0603-RES]  14.48,23.88 90 top
R39  240  [0603-RES]  18.29,22.61 180 top
R40  22k  [0603-RES]  14.48,37.72 270 top
R41  22k  [0603-RES]  14.48,34.54 90 top
R42  240  [0603-RES]  18.29,33.27 180 top
R43  22k  [0603-RES]  14.48,48.39 270 top
R44  22k  [0603-RES]  14.48,45.21 90 top
R45  240  [0603-RES]  18.29,43.94 180 top
R46  22k  [0603-RES]  14.48,59.05 270 top
R47  22k  [0603-RES]  14.48,55.88 90 top
R48  240  [0603-RES]  18.29,54.61 180 top
R49  22k  [0603-RES]  14.48,69.72 270 top
R50  22k  [0603-RES]  14.48,66.55 90 top
R51  240  [0603-RES]  18.29,65.28 180 top
R52  22k  [0603-RES]  14.48,80.39 270 top
R53  22k  [0603-RES]  14.48,77.22 90 top
R54  240  [0603-RES]  18.29,75.95 180 top
R55  22k  [0603-RES]  14.48,91.06 270 top
R56  22k  [0603-RES]  14.48,87.88 90 top
R57  240  [0603-RES]  18.29,86.61 180 top
R58  22k  [0603-RES]  14.48,101.73 270 top
R59  22k  [0603-RES]  14.48,98.55 90 top
R60  240  [0603-RES]  18.29,97.28 180 top
R61  22k  [0603-RES]  25.15,5.71 270 top
R62  22k  [0603-RES]  25.15,2.54 90 top
R63  240  [0603-RES]  28.96,1.27 180 top
R64  22k  [0603-RES]  25.15,16.38 270 top
R65  22k  [0603-RES]  25.15,13.21 90 top
R66  240  [0603-RES]  28.96,11.94 180 top
R67  22k  [0603-RES]  25.15,27.05 270 top
R68  22k  [0603-RES]  25.15,23.88 90 top
R69  240  [0603-RES]  28.96,22.61 180 top
R70  22k  [0603-RES]  25.15,37.72 270 top
R71  22k  [0603-RES]  25.15,34.54 90 top
R72  240  [0603-RES]  28.96,33.27 180 top
R73  22k  [0603-RES]  25.15,48.39 270 top
R74  22k  [0603-RES]  25.15,45.21 90 top
R75  240  [0603-RES]  28.96,43.94 180 top
R76  22k  [0603-RES]  25.15,59.05 270 top
R77  22k  [0603-RES]  25.15,55.88 90 top
R78  240  [0603-RES]  28.96,54.61 180 top
R79  22k  [0603-RES]  25.15,69.72 270 top
R80  22k  [0603-RES]  25.15,66.55 90 top
R81  240  [0603-RES]  28.96,65.28 180 top
R82  22k  [0603-RES]  25.15,80.39 270 top
R83  22k  [0603-RES]  25.15,77.22 90 top
R84  240  [0603-RES]  28.96,75.95 180 top
R85  22k  [0603-RES]  25.15,91.06 270 top
R86  22k  [0603-RES]  25.15,87.88 90 top
R87  240  [0603-RES]  28.96,86.61 180 top
R88  22k  [0603-RES]  25.15,101.73 270 top
R89  22k  [0603-RES]  25.15,98.55 90 top
R90  240  [0603-RES]  28.96,97.28 180 top
R91  22k  [0603-RES]  35.81,5.71 270 top
R92  22k  [0603-RES]  35.81,2.54 90 top
R93  240  [0603-RES]  39.62,1.27 180 top
R94  22k  [0603-RES]  35.81,16.38 270 top
R95  22k  [0603-RES]  35.81,13.21 90 top
R96  240  [0603-RES]  39.62,11.94 180 top
R97  22k  [0603-RES]  35.81,27.05 270 top
R98  22k  [0603-RES]  35.81,23.88 90 top
R99  240  [0603-RES]  39.62,22.61 180 top
R100  22k  [0603-RES]  35.81,37.72 270 top
R101  22k  [0603-RES]  35.81,34.54 90 top
R102  240  [0603-RES]  39.62,33.27 180 top
R103  22k  [0603-RES]  35.81,48.39 270 top
R104  22k  [0603-RES]  35.81,45.21 90 top
R105  240  [0603-RES]  39.62,43.94 180 top
R106  22k  [0603-RES]  35.81,59.05 270 top
R107  22k  [0603-RES]  35.81,55.88 90 top
R108  240  [0603-RES]  39.62,54.61 180 top
R109  22k  [0603-RES]  35.81,69.72 270 top
R110  22k  [0603-RES]  35.81,66.55 90 top
R111  240  [0603-RES]  39.62,65.28 180 top
R112  22k  [0603-RES]  35.81,80.39 270 top
R113  22k  [0603-RES]  35.81,77.22 90 top
R114  240  [0603-RES]  39.62,75.95 180 top
R115  22k  [0603-RES]  35.81,91.06 270 top
R116  22k  [0603-RES]  35.81,87.88 90 top
R117  240  [0603-RES]  39.62,86.61 180 top
R118  22k  [0603-RES]  35.81,101.73 270 top
R119  22k  [0603-RES]  35.81,98.55 90 top
R120  240  [0603-RES]  39.62,97.28 180 top
R121  22k  [0603-RES]  46.48,5.71 270 top
R122  22k  [0603-RES]  46.48,2.54 90 top
R123  240  [0603-RES]  50.29,1.27 180 top
R124  22k  [0603-RES]  46.48,16.38 270 top
R125  22k  [0603-RES]  46.48,13.21 90 top
R126  240  [0603-RES]  50.29,11.94 180 top
R127  22k  [0603-RES]  46.48,27.05 270 top
R128  22k  [0603-RES]  46.48,23.88 90 top
R129  240  [0603-RES]  50.29,22.61 180 top
R130  22k  [0603-RES]  46.48,37.72 270 top
R131  22k  [0603-RES]  46.48,34.54 90 top
R132  240  [0603-RES]  50.29,33.27 180 top
R133  22k  [0603-RES]  46.48,48.39 270 top
R134  22k  [0603-RES]  46.48,45.21 90 top
R135  240  [0603-RES]  50.29,43.94 180 top
R136  22k  [0603-RES]  46.48,59.05 270 top
R137  22k  [0603-RES]  46.48,55.88 90 top
R138  240  [0603-RES]  50.29,54.61 180 top
R139  22k  [0603-RES]  46.48,69.72 270 top
R140  22k  [0603-RES]  46.48,66.55 90 top
R141  240  [0603-RES]  50.29,65.28 180 top
R142  22k  [0603-RES]  46.48,80.39 270 top
R143  22k  [0603-RES]  46.48,77.22 90 top
R144  240  [0603-RES]  50.29,75.95 180 top
R145  22k  [0603-RES]  46.48,91.06 270 top
R146  22k  [0603-RES]  46.48,87.88 90 top
R147  240  [0603-RES]  50.29,86.61 180 top
R148  22k  [0603-RES]  46.48,101.73 270 top
R149  22k  [0603-RES]  46.48,98.55 90 top
R150  240  [0603-RES]  50.29,97.28 180 top
R151  22k  [0603-RES]  57.15,5.71 270 top
R152  22k  [0603-RES]  57.15,2.54 90 top
R153  240  [0603-RES]  60.96,1.27 180 top
R154  22k  [0603-RES]  57.15,16.38 270 top
R155  22k  [0603-RES]  57.15,13.21 90 top
R156  240  [0603-RES]  60.96,11.94 180 top
R157  22k  [0603-RES]  57.15,27.05 270 top
R158  22k  [0603-RES]  57.15,23.88 90 top
R159  240  [0603-RES]  60.96,22.61 180 top
R160  22k  [0603-RES]  57.15,37.72 270 top
R161  22k  [0603-RES]  57.15,34.54 90 top
R162  240  [0603-RES]  60.96,33.27 180 top
R163  22k  [0603-RES]  57.15,48.39 270 top
R164  22k  [0603-RES]  57.15,45.21 90 top
R165  240  [0603-RES]  60.96,43.94 180 top
R166  22k  [0603-RES]  57.15,59.05 270 top
R167  22k  [0603-RES]  57.15,55.88 90 top
R168  240  [0603-RES]  60.96,54.61 180 top
R169  22k  [0603-RES]  57.15,69.72 270 top
R170  22k  [0603-RES]  57.15,66.55 90 top
R171  240  [0603-RES]  60.96,65.28 180 top
R172  22k  [0603-RES]  57.15,80.39 270 top
R173  22k  [0603-RES]  57.15,77.22 90 top
R174  240  [0603-RES]  60.96,75.95 180 top
R175  22k  [0603-RES]  57.15,91.06 270 top
R176  22k  [0603-RES]  57.15,87.88 90 top
R177  240  [0603-RES]  60.96,86.61 180 top
R178  22k  [0603-RES]  57.15,101.73 270 top
R179  22k  [0603-RES]  57.15,98.55 90 top
R180  240  [0603-RES]  60.96,97.28 180 top
R181  22k  [0603-RES]  67.82,5.71 270 top
R182  22k  [0603-RES]  67.82,2.54 90 top
R183  240  [0603-RES]  71.63,1.27 180 top
R184  22k  [0603-RES]  67.82,16.38 270 top
R185  22k  [0603-RES]  67.82,13.21 90 top
R186  240  [0603-RES]  71.63,11.94 180 top
R187  22k  [0603-RES]  67.82,27.05 270 top
R188  22k  [0603-RES]  67.82,23.88 90 top
R189  240  [0603-RES]  71.63,22.61 180 top
R190  22k  [0603-RES]  67.82,37.72 270 top
R191  22k  [0603-RES]  67.82,34.54 90 top
R192  240  [0603-RES]  71.63,33.27 180 top
R193  22k  [0603-RES]  67.82,48.39 270 top
R194  22k  [0603-RES]  67.82,45.21 90 top
R195  240  [0603-RES]  71.63,43.94 180 top
R196  22k  [0603-RES]  67.82,59.05 270 top
R197  22k  [0603-RES]  67.82,55.88 90 top
R198  240  [0603-RES]  71.63,54.61 180 top
R199  22k  [0603-RES]  67.82,69.72 270 top
R200  22k  [0603-RES]  67.82,66.55 90 top
R201  240  [0603-RES]  71.63,65.28 180 top
R202  22k  [0603-RES]  67.82,80.39 270 top
R203  22k  [0603-RES]  67.82,77.22 90 top
R204  240  [0603-RES]  71.63,75.95 180 top
R205  22k  [0603-RES]  67.82,91.06 270 top
R206  22k  [0603-RES]  67.82,87.88 90 top
R207  240  [0603-RES]  71.63,86.61 180 top
R208  22k  [0603-RES]  67.82,101.73 270 top
R209  22k  [0603-RES]  67.82,98.55 90 top
R210  240  [0603-RES]  71.63,97.28 180 top
R211  22k  [0603-RES]  78.49,5.71 270 top
R212  22k  [0603-RES]  78.49,2.54 90 top
R213  240  [0603-RES]  82.3,1.27 180 top
R214  22k  [0603-RES]  78.49,16.38 270 top
R215  22k  [0603-RES]  78.49,13.21 90 top
R216  240  [0603-RES]  82.3,11.94 180 top
R217  22k  [0603-RES]  78.49,27.05 270 top
R218  22k  [0603-RES]  78.49,23.88 90 top
R219  240  [0603-RES]  82.3,22.61 180 top
R220  22k  [0603-RES]  78.49,37.72 270 top
R221  22k  [0603-RES]  78.49,34.54 90 top
R222  240  [0603-RES]  82.3,33.27 180 top
R223  22k  [0603-RES]  78.49,48.39 270 top
R224  22k  [0603-RES]  78.49,45.21 90 top
R225  240  [0603-RES]  82.3,43.94 180 top
R226  22k  [0603-RES]  78.49,59.05 270 top
R227  22k  [0603-RES]  78.49,55.88 90 top
R228  240  [0603-RES]  82.3,54.61 180 top
R229  22k  [0603-RES]  78.49,69.72 270 top
R230  22k  [0603-RES]  78.49,66.55 90 top
R231  240  [0603-RES]  82.3,65.28 180 top
R232  22k  [0603-RES]  78.49,80.39 270 top
R233  22k  [0603-RES]  78.49,77.22 90 top
R234  240  [0603-RES]  82.3,75.95 180 top
R235  22k  [0603-RES]  78.49,91.06 270 top
R236  22k  [0603-RES]  78.49,87.88 90 top
R237  240  [0603-RES]  82.3,86.61 180 top
R238  22k  [0603-RES]  78.49,101.73 270 top
R239  22k  [0603-RES]  78.49,98.55 90 top
R240  240  [0603-RES]  82.3,97.28 180 top
R241  22k  [0603-RES]  89.15,5.71 270 top
R242  22k  [0603-RES]  89.15,2.54 90 top
R243  240  [0603-RES]  92.96,1.27 180 top
R244  22k  [0603-RES]  89.15,16.38 270 top
R245  22k  [0603-RES]  89.15,13.21 90 top
R246  240  [0603-RES]  92.96,11.94 180 top
R247  22k  [0603-RES]  89.15,27.05 270 top
R248  22k  [0603-RES]  89.15,23.88 90 top
R249  240  [0603-RES]  92.96,22.61 180 top
R250  22k  [0603-RES]  89.15,37.72 270 top
R251  22k  [0603-RES]  89.15,34.54 90 top
R252  240  [0603-RES]  92.96,33.27 180 top
R253  22k  [0603-RES]  89.15,48.39 270 top
R254  22k  [0603-RES]  89.15,45.21 90 top
R255  240  [0603-RES]  92.96,43.94 180 top
R256  22k  [0603-RES]  89.15,59.05 270 top
R257  22k  [0603-RES]  89.15,55.88 90 top
R258  240  [0603-RES]  92.96,54.61 180 top
R259  22k  [0603-RES]  89.15,69.72 270 top
R260  22k  [0603-RES]  89.15,66.55 90 top
R261  240  [0603-RES]  92.96,65.28 180 top
R262  22k  [0603-RES]  89.15,80.39 270 top
R263  22k  [0603-RES]  89.15,77.22 90 top
R264  240  [0603-RES]  92.96,75.95 180 top
R265  22k  [0603-RES]  89.15,91.06 270 top
R266  22k  [0603-RES]  89.15,87.88 90 top
R267  240  [0603-RES]  92.96,86.61 180 top
R268  22k  [0603-RES]  89.15,101.73 270 top
R269  22k  [0603-RES]  89.15,98.55 90 top
R270  240  [0603-RES]  92.96,97.28 180 top
R271  22k  [0603-RES]  99.82,5.71 270 top
R272  22k  [0603-RES]  99.82,2.54 90 top
R273  240  [0603-RES]  103.63,1.27 180 top
R274  22k  [0603-RES]  99.82,16.38 270 top
R275  22k  [0603-RES]  99.82,13.21 90 top
R276  240  [0603-RES]  103.63,11.94 180 top
R277  22k  [0603-RES]  99.82,27.05 270 top
R278  22k  [0603-RES]  99.82,23.88 90 top
R279  240  [0603-RES]  103.63,22.61 180 top
R280  22k  [0603-RES]  99.82,37.72 270 top
R281  22k  [0603-RES]  99.82,34.54 90 top
R282  240  [0603-RES]  103.63,33.27 180 top
R283  22k  [0603-RES]  99.82,48.39 270 top
R284  22k  [0603-RES]  99.82,45.21 90 top
R285  240  [0603-RES]  103.63,43.94 180 top
R286  22k  [0603-RES]  99.82,59.05 270 top
R287  22k  [0603-RES]  99.82,55.88 90 top
R288  240  [0603-RES]  103.63,54.61 180 top
R289  22k  [0603-RES]  99.82,69.72 270 top
R290  22k  [0603-RES]  99.82,66.55 90 top
R291  240  [0603-RES]  103.63,65.28 180 top
R292  22k  [0603-RES]  99.82,80.39 270 top
R293  22k  [0603-RES]  99.82,77.22 90 top
R294  240  [0603-RES]  103.63,75.95 180 top
R295  22k  [0603-RES]  99.82,91.06 270 top
R296  22k  [0603-RES]  99.82,87.88 90 top
R297  240  [0603-RES]  103.63,86.61 180 top
R298  22k  [0603-RES]  99.82,101.73 270 top
R299  22k  [0603-RES]  99.82,98.55 90 top
R300  240  [0603-RES]  103.63,97.28 180 top
U1  RPI-1031  [RPI-1031]  7.62,4.45 90 top
U2  RPI-1031  [RPI-1031]  7.62,15.11 90 top
U3  RPI-1031  [RPI-1031]  7.62,25.78 90 top
U4  RPI-1031  [RPI-1031]  7.62,36.45 90 top
U5  RPI-1031  [RPI-1031]  7.62,47.12 90 top
U6  RPI-1031  [RPI-1031]  7.62,57.78 90 top
U7  RPI-1031  [RPI-1031]  7.62,68.45 90 top
U8  RPI-1031  [RPI-1031]  7.62,79.12 90 top
U9  RPI-1031  [RPI-1031]  7.62,89.79 90 top
U10  RPI-1031  [RPI-1031]  7.62,100.46 90 top
U11  RPI-1031  [RPI-1031]  18.29,4.45 90 top
U12  RPI-1031  [RPI-1031]  18.29,15.11 90 top
U13  RPI-1031  [RPI-1031]  18.29,25.78 90 top
U14  RPI-1031  [RPI-1031]  18.29,36.45 90 top
U15  RPI-1031  [RPI-1031]  18.29,47.12 90 top
U16  RPI-1031  [RPI-1031]  18.29,57.78 90 top
U17  RPI-1031  [RPI-1031]  18.29,68.45 90 top
U18  RPI-1031  [RPI-1031]  18.29,79.12 90 top
U19  RPI-1031  [RPI-1031]  18.29,89.79 90 top
U20  RPI-1031  [RPI-1031]  18.29,100.46 90 top
U21  RPI-1031  [RPI-1031]  28.96,4.45 90 top
U22  RPI-1031  [RPI-1031]  28.96,15.11 90 top
U23  RPI-1031  [RPI-1031]  28.96,25.78 90 top
U24  RPI-1031  [RPI-1031]  28.96,36.45 90 top
U25  RPI-1031  [RPI-1031]  28.96,47.12 90 top
U26  RPI-1031  [RPI-1031]  28.96,57.78 90 top
U27  RPI-1031  [RPI-1031]  28.96,68.45 90 top
U28  RPI-1031  [RPI-1031]  28.96,79.12 90 top
U29  RPI-1031  [RPI-1031]  28.96,89.79 90 top
U30  RPI-1031  [RPI-1031]  28.96,100.46 90 top
U31  RPI-1031  [RPI-1031]  39.62,4.45 90 top
U32  RPI-1031  [RPI-1031]  39.62,15.11 90 top
U33  RPI-1031  [RPI-1031]  39.62,25.78 90 top
U34  RPI-1031  [RPI-1031]  39.62,36.45 90 top
U35  RPI-1031  [RPI-1031]  39.62,47.12 90 top
U36  RPI-1031  [RPI-1031]  39.62,57.78 90 top
U37  RPI-1031  [RPI-1031]  39.62,68.45 90 top
U38  RPI-1031  [RPI-1031]  39.62,79.12 90 top
U39  RPI-1031  [RPI-1031]  39.62,89.79 90 top
U40  RPI-1031  [RPI-1031]  39.62,100.46 90 top
U41  RPI-1031  [RPI-1031]  50.29,4.45 90 top
U42  RPI-1031  [RPI-1031]  50.29,15.11 90 top
U43  RPI-1031  [RPI-1031]  50.29,25.78 90 top
U44  RPI-1031  [RPI-1031]  50.29,36.45 90 top
U45  RPI-1031  [RPI-1031]  50.29,47.12 90 top
U46  RPI-1031  [RPI-1031]  50.29,57.78 90 top
U47  RPI-1031  [RPI-1031]  50.29,68.45 90 top
U48  RPI-1031  [RPI-1031]  50.29,79.12 90 top
U49  RPI-1031  [RPI-1031]  50.29,89.79 90 top
U50  RPI-1031  [RPI-1031]  50.29,100.46 90 top
U51  RPI-1031  [RPI-1031]  60.96,4.45 90 top
U52  RPI-1031  [RPI-1031]  60.96,15.11 90 top
U53  RPI-1031  [RPI-1031]  60.96,25.78 90 top
U54  RPI-1031  [RPI-1031]  60.96,36.45 90 top
U55  RPI-1031  [RPI-1031]  60.96,47.12 90 top
U56  RPI-1031  [RPI-1031]  60.96,57.78 90 top
U57  RPI-1031  [RPI-1031]  60.96,68.45 90 top
U58  RPI-1031  [RPI-1031]  60.96,79.12 90 top
U59  RPI-1031  [RPI-1031]  60.96,89.79 90 top
U60  RPI-1031  [RPI-1031]  60.96,100.46 90 top
U61  RPI-1031  [RPI-1031]  71.63,4.45 90 top
U62  RPI-1031  [RPI-1031]  71.63,15.11 90 top
U63  RPI-1031  [RPI-1031]  71.63,25.78 90 top
U64  RPI-1031  [RPI-1031]  71.63,36.45 90 top
U65  RPI-1031  [RPI-1031]  71.63,47.12 90 top
U66  RPI-1031  [RPI-1031]  71.63,57.78 90 top
U67  RPI-1031  [RPI-1031]  71.63,68.45 90 top
U68  RPI-1031  [RPI-1031]  71.63,79.12 90 top
U69  RPI-1031  [RPI-1031]  71.63,89.79 90 top
U70  RPI-1031  [RPI-1031]  71.63,100.46 90 top
U71  RPI-1031  [RPI-1031]  82.3,4.45 90 top
U72  RPI-1031  [RPI-1031]  82.3,15.11 90 top
U73  RPI-1031  [RPI-1031]  82.3,25.78 90 top
U74  RPI-1031  [RPI-1031]  82.3,36.45 90 top
U75  RPI-1031  [RPI-1031]  82.3,47.12 90 top
U76  RPI-1031  [RPI-1031]  82.3,57.78 90 top
U77  RPI-1031  [RPI-1031]  82.3,68.45 90 top
U78  RPI-1031  [RPI-1031]  82.3,79.12 90 top
U79  RPI-1031  [RPI-1031]  82.3,89.79 90 top
U80  RPI-1031  [RPI-1031]  82.3,100.46 90 top
U81  RPI-1031  [RPI-1031]  92.96,4.45 90 top
U82  RPI-1031  [RPI-1031]  92.96,15.11 90 top
U83  RPI-1031  [RPI-1031]  92.96,25.78 90 top
U84  RPI-1031  [RPI-1031]  92.96,36.45 90 top
U85  RPI-1031  [RPI-1031]  92.96,47.12 90 top
U86  RPI-1031  [RPI-1031]  92.96,57.78 90 top
U87  RPI-1031  [RPI-1031]  92.96,68.45 90 top
U88  RPI-1031  [RPI-1031]  92.96,79.12 90 top
U89  RPI-1031  [RPI-1031]  92.96,89.79 90 top
U90  RPI-1031  [RPI-1031]  92.96,100.46 90 top
U91  RPI-1031  [RPI-1031]  103.63,4.45 90 top
U92  RPI-1031  [RPI-1031]  103.63,15.11 90 top
U93  RPI-1031  [RPI-1031]  103.63,25.78 90 top
U94  RPI-1031  [RPI-1031]  103.63,36.45 90 top
U95  RPI-1031  [RPI-1031]  103.63,47.12 90 top
U96  RPI-1031  [RPI-1031]  103.63,57.78 90 top
U97  RPI-1031  [RPI-1031]  103.63,68.45 90 top
U98  RPI-1031  [RPI-1031]  103.63,79.12 90 top
U99  RPI-1031  [RPI-1031]  103.63,89.79 90 top
U100  RPI-1031  [RPI-1031]  103.63,100.46 90 top
U$1  OSHW-LOGOS  [OSHW-LOGO-S]  7.62,8.26 270 top
U$2  OSHW-LOGOS  [OSHW-LOGO-S]  7.62,18.92 270 top
U$3  OSHW-LOGOS  [OSHW-LOGO-S]  7.62,29.59 270 top
U$4  OSHW-LOGOS  [OSHW-LOGO-S]  7.62,40.26 270 top
U$5  OSHW-LOGOS  [OSHW-LOGO-S]  7.62,50.93 270 top
U$6  OSHW-LOGOS  [OSHW-LOGO-S]  7.62,61.59 270 top
U$7  OSHW-LOGOS  [OSHW-LOGO-S]  7.62,72.26 270 top
U$8  OSHW-LOGOS  [OSHW-LOGO-S]  7.62,82.93 270 top
U$9  OSHW-LOGOS  [OSHW-LOGO-S]  7.62,93.6 270 top
U$10  OSHW-LOGOS  [OSHW-LOGO-S]  7.62,104.27 270 top
U$11  OSHW-LOGOS  [OSHW-LOGO-S]  18.29,8.26 270 top
U$12  OSHW-LOGOS  [OSHW-LOGO-S]  18.29,18.92 270 top
U$13  OSHW-LOGOS  [OSHW-LOGO-S]  18.29,29.59 270 top
U$14  OSHW-LOGOS  [OSHW-LOGO-S]  18.29,40.26 270 top
U$15  OSHW-LOGOS  [OSHW-LOGO-S]  18.29,50.93 270 top
U$16  OSHW-LOGOS  [OSHW-LOGO-S]  18.29,61.59 270 top
U$17  OSHW-LOGOS  [OSHW-LOGO-S]  18.29,72.26 270 top
U$18  OSHW-LOGOS  [OSHW-LOGO-S]  18.29,82.93 270 top
U$19  OSHW-LOGOS  [OSHW-LOGO-S]  18.29,93.6 270 top
U$20  OSHW-LOGOS  [OSHW-LOGO-S]  18.29,104.27 270 top
U$21  OSHW-LOGOS  [OSHW-LOGO-S]  28.96,8.26 270 top
U$22  OSHW-LOGOS  [OSHW-LOGO-S]  28.96,18.92 270 top
U$23  OSHW-LOGOS  [OSHW-LOGO-S]  28.96,29.59 270 top
U$24  OSHW-LOGOS  [OSHW-LOGO-S]  28.96,40.26 270 top
U$25  OSHW-LOGOS  [OSHW-LOGO-S]  28.96,50.93 270 top
U$26  OSHW-LOGOS  [OSHW-LOGO-S]  28.96,61.59 270 top
U$27  OSHW-LOGOS  [OSHW-LOGO-S]  28.96,72.26 270 top
U$28  OSHW-LOGOS  [OSHW-LOGO-S]  28.96,82.93 270 top
U$29  OSHW-LOGOS  [OSHW-LOGO-S]  28.96,93.6 270 top
U$30  OSHW-LOGOS  [OSHW-LOGO-S]  28.96,104.27 270 top
U$31  OSHW-LOGOS  [OSHW-LOGO-S]  39.62,8.26 270 top
U$32  OSHW-LOGOS  [OSHW-LOGO-S]  39.62,18.92 270 top
U$33  OSHW-LOGOS  [OSHW-LOGO-S]  39.62,29.59 270 top
U$34  OSHW-LOGOS  [OSHW-LOGO-S]  39.62,40.26 270 top
U$35  OSHW-LOGOS  [OSHW-LOGO-S]  39.62,50.93 270 top
U$36  OSHW-LOGOS  [OSHW-LOGO-S]  39.62,61.59 270 top
U$37  OSHW-LOGOS  [OSHW-LOGO-S]  39.62,72.26 270 top
U$38  OSHW-LOGOS  [OSHW-LOGO-S]  39.62,82.93 270 top
U$39  OSHW-LOGOS  [OSHW-LOGO-S]  39.62,93.6 270 top
U$40  OSHW-LOGOS  [OSHW-LOGO-S]  39.62,104.27 270 top
U$41  OSHW-LOGOS  [OSHW-LOGO-S]  50.29,8.26 270 top
U$42  OSHW-LOGOS  [OSHW-LOGO-S]  50.29,18.92 270 top
U$43  OSHW-LOGOS  [OSHW-LOGO-S]  50.29,29.59 270 top
U$44  OSHW-LOGOS  [OSHW-LOGO-S]  50.29,40.26 270 top
U$45  OSHW-LOGOS  [OSHW-LOGO-S]  50.29,50.93 270 top
U$46  OSHW-LOGOS  [OSHW-LOGO-S]  50.29,61.59 270 top
U$47  OSHW-LOGOS  [OSHW-LOGO-S]  50.29,72.26 270 top
U$48  OSHW-LOGOS  [OSHW-LOGO-S]  50.29,82.93 270 top
U$49  OSHW-LOGOS  [OSHW-LOGO-S]  50.29,93.6 270 top
U$50  OSHW-LOGOS  [OSHW-LOGO-S]  50.29,104.27 270 top
U$51  OSHW-LOGOS  [OSHW-LOGO-S]  60.96,8.26 270 top
U$52  OSHW-LOGOS  [OSHW-LOGO-S]  60.96,18.92 270 top
U$53  OSHW-LOGOS  [OSHW-LOGO-S]  60.96,29.59 270 top
U$54  OSHW-LOGOS  [OSHW-LOGO-S]  60.96,40.26 270 top
U$55  OSHW-LOGOS  [OSHW-LOGO-S]  60.96,50.93 270 top
U$56  OSHW-LOGOS  [OSHW-LOGO-S]  60.96,61.59 270 top
U$57  OSHW-LOGOS  [OSHW-LOGO-S]  60.96,72.26 270 top
U$58  OSHW-LOGOS  [OSHW-LOGO-S]  60.96,82.93 270 top
U$59  OSHW-LOGOS  [OSHW-LOGO-S]  60.96,93.6 270 top
U$60  OSHW-LOGOS  [OSHW-LOGO-S]  60.96,104.27 270 top
U$61  OSHW-LOGOS  [OSHW-LOGO-S]  71.63,8.26 270 top
U$62  OSHW-LOGOS  [OSHW-LOGO-S]  71.63,18.92 270 top
U$63  OSHW-LOGOS  [OSHW-LOGO-S]  71.63,29.59 270 top
U$64  OSHW-LOGOS  [OSHW-LOGO-S]  71.63,40.26 270 top
U$65  OSHW-LOGOS  [OSHW-LOGO-S]  71.63,50.93 270 top
U$66  OSHW-LOGOS  [OSHW-LOGO-S]  71.63,61.59 270 top
U$67  OSHW-LOGOS  [OSHW-LOGO-S]  71.63,72.26 270 top
U$68  OSHW-LOGOS  [OSHW-LOGO-S]  71.63,82.93 270 top
U$69  OSHW-LOGOS  [OSHW-LOGO-S]  71.63,93.6 270 top
U$70  OSHW-LOGOS  [OSHW-LOGO-S]  71.63,104.27 270 top
U$71  OSHW-LOGOS  [OSHW-LOGO-S]  82.3,8.26 270 top
U$72  OSHW-LOGOS  [OSHW-LOGO-S]  82.3,18.92 270 top
U$73  OSHW-LOGOS  [OSHW-LOGO-S]  82.3,29.59 270 top
U$74  OSHW-LOGOS  [OSHW-LOGO-S]  82.3,40.26 270 top
U$75  OSHW-LOGOS  [OSHW-LOGO-S]  82.3,50.93 270 top
U$76  OSHW-LOGOS  [OSHW-LOGO-S]  82.3,61.59 270 top
U$77  OSHW-LOGOS  [OSHW-LOGO-S]  82.3,72.26 270 top
U$78  OSHW-LOGOS  [OSHW-LOGO-S]  82.3,82.93 270 top
U$79  OSHW-LOGOS  [OSHW-LOGO-S]  82.3,93.6 270 top
U$80  OSHW-LOGOS  [OSHW-LOGO-S]  82.3,104.27 270 top
U$81  OSHW-LOGOS  [OSHW-LOGO-S]  92.96,8.26 270 top
U$82  OSHW-LOGOS  [OSHW-LOGO-S]  92.96,18.92 270 top
U$83  OSHW-LOGOS  [OSHW-LOGO-S]  92.96,29.59 270 top
U$84  OSHW-LOGOS  [OSHW-LOGO-S]  92.96,40.26 270 top
U$85  OSHW-LOGOS  [OSHW-LOGO-S]  92.96,50.93 270 top
U$86  OSHW-LOGOS  [OSHW-LOGO-S]  92.96,61.59 270 top
U$87  OSHW-LOGOS  [OSHW-LOGO-S]  92.96,72.26 270 top
U$88  OSHW-LOGOS  [OSHW-LOGO-S]  92.96,82.93 270 top
U$89  OSHW-LOGOS  [OSHW-LOGO-S]  92.96,93.6 270 top
U$90  OSHW-LOGOS  [OSHW-LOGO-S]  92.96,104.27 270 top
U$91  OSHW-LOGOS  [OSHW-LOGO-S]  103.63,8.26 270 top
U$92  OSHW-LOGOS  [OSHW-LOGO-S]  103.63,18.92 270 top
U$93  OSHW-LOGOS  [OSHW-LOGO-S]  103.63,29.59 270 top
U$94  OSHW-LOGOS  [OSHW-LOGO-S]  103.63,40.26 270 top
U$95  OSHW-LOGOS  [OSHW-LOGO-S]  103.63,50.93 270 top
U$96  OSHW-LOGOS  [OSHW-LOGO-S]  103.63,61.59 270 top
U$97  OSHW-LOGOS  [OSHW-LOGO-S]  103.63,72.26 270 top
U$98  OSHW-LOGOS  [OSHW-LOGO-S]  103.63,82.93 270 top
U$99  OSHW-LOGOS  [OSHW-LOGO-S]  103.63,93.6 270 top
U$100  OSHW-LOGOS  [OSHW-LOGO-S]  103.63,104.27 270 top

## Library data of the parts
JP1 JP4-JP6 JP9 JP10 JP13 JP14 JP17 JP18 JP21 JP22 JP25 JP26 JP29 JP30 JP33 JP34 JP37 JP38 JP41 JP42 JP45 JP46 JP49 JP50 JP53 JP54 JP57 JP58 JP61 JP62 JP65 JP66 JP69 JP70 JP73 JP74 JP77 JP78 JP81 JP82 JP85 JP86 JP89 JP90 JP93 JP94 JP97 JP98 JP101 JP102 JP105 JP106 JP109 JP110 JP113 JP114 JP117 JP118 JP121 JP122 JP125 JP126 JP129 JP130 JP133 JP134 JP137 JP138 JP141 JP142 JP145 JP146 JP149 JP150 JP153 JP154 JP157 JP158 JP161 JP162 JP165 JP166 JP169 JP170 JP173 JP174 JP177 JP178 JP181 JP182 JP185 JP186 JP189 JP190 JP193 JP194 JP197 JP198 JP201 JP202 JP205 JP206 JP209 JP210 JP213 JP214 JP217 JP218 JP221 JP222 JP225 JP226 JP229 JP230 JP233 JP234 JP237 JP238 JP241 JP242 JP245 JP246 JP249 JP250 JP253 JP254 JP257 JP258 JP261 JP262 JP265 JP266 JP269 JP270 JP273 JP274 JP277 JP278 JP281 JP282 JP285 JP286 JP289 JP290 JP293 JP294 JP297 JP298 JP301 JP302 JP305 JP306 JP309 JP310 JP313 JP314 JP317 JP318 JP321 JP322 JP325 JP326 JP329 JP330 JP333 JP334 JP337 JP338 JP341 JP342 JP345 JP346 JP349 JP350 JP353 JP354 JP357 JP358 JP361 JP362 JP365 JP366 JP369 JP370 JP373 JP374 JP377 JP378 JP381 JP382 JP385 JP386 JP389 JP390 JP393 JP394 JP397 JP398 U$1-U$100 = SparkFun
JP2 JP3 JP7 JP8 JP11 JP12 JP15 JP16 JP19 JP20 JP23 JP24 JP27 JP28 JP31 JP32 JP35 JP36 JP39 JP40 JP43 JP44 JP47 JP48 JP51 JP52 JP55 JP56 JP59 JP60 JP63 JP64 JP67 JP68 JP71 JP72 JP75 JP76 JP79 JP80 JP83 JP84 JP87 JP88 JP91 JP92 JP95 JP96 JP99 JP100 JP103 JP104 JP107 JP108 JP111 JP112 JP115 JP116 JP119 JP120 JP123 JP124 JP127 JP128 JP131 JP132 JP135 JP136 JP139 JP140 JP143 JP144 JP147 JP148 JP151 JP152 JP155 JP156 JP159 JP160 JP163 JP164 JP167 JP168 JP171 JP172 JP175 JP176 JP179 JP180 JP183 JP184 JP187 JP188 JP191 JP192 JP195 JP196 JP199 JP200 JP203 JP204 JP207 JP208 JP211 JP212 JP215 JP216 JP219 JP220 JP223 JP224 JP227 JP228 JP231 JP232 JP235 JP236 JP239 JP240 JP243 JP244 JP247 JP248 JP251 JP252 JP255 JP256 JP259 JP260 JP263 JP264 JP267 JP268 JP271 JP272 JP275 JP276 JP279 JP280 JP283 JP284 JP287 JP288 JP291 JP292 JP295 JP296 JP299 JP300 JP303 JP304 JP307 JP308 JP311 JP312 JP315 JP316 JP319 JP320 JP323 JP324 JP327 JP328 JP331 JP332 JP335 JP336 JP339 JP340 JP343 JP344 JP347 JP348 JP351 JP352 JP355 JP356 JP359 JP360 JP363 JP364 JP367 JP368 JP371 JP372 JP375 JP376 JP379 JP380 JP383 JP384 JP387 JP388 JP391 JP392 JP395 JP396 JP399 JP400 = abes
R1 R2 R4 R5 R7 R8 R10 R11 R13 R14 R16 R17 R19 R20 R22 R23 R25 R26 R28 R29 R31 R32 R34 R35 R37 R38 R40 R41 R43 R44 R46 R47 R49 R50 R52 R53 R55 R56 R58 R59 R61 R62 R64 R65 R67 R68 R70 R71 R73 R74 R76 R77 R79 R80 R82 R83 R85 R86 R88 R89 R91 R92 R94 R95 R97 R98 R100 R101 R103 R104 R106 R107 R109 R110 R112 R113 R115 R116 R118 R119 R121 R122 R124 R125 R127 R128 R130 R131 R133 R134 R136 R137 R139 R140 R142 R143 R145 R146 R148 R149 R151 R152 R154 R155 R157 R158 R160 R161 R163 R164 R166 R167 R169 R170 R172 R173 R175 R176 R178 R179 R181 R182 R184 R185 R187 R188 R190 R191 R193 R194 R196 R197 R199 R200 R202 R203 R205 R206 R208 R209 R211 R212 R214 R215 R217 R218 R220 R221 R223 R224 R226 R227 R229 R230 R232 R233 R235 R236 R238 R239 R241 R242 R244 R245 R247 R248 R250 R251 R253 R254 R256 R257 R259 R260 R262 R263 R265 R266 R268 R269 R271 R272 R274 R275 R277 R278 R280 R281 R283 R284 R286 R287 R289 R290 R292 R293 R295 R296 R298 R299 = SparkFun-Resistors; PROD_ID: RES-07853; VALUE: 22K
R3 R6 R9 R12 R15 R18 R21 R24 R27 R30 R33 R36 R39 R42 R45 R48 R51 R54 R57 R60 R63 R66 R69 R72 R75 R78 R81 R84 R87 R90 R93 R96 R99 R102 R105 R108 R111 R114 R117 R120 R123 R126 R129 R132 R135 R138 R141 R144 R147 R150 R153 R156 R159 R162 R165 R168 R171 R174 R177 R180 R183 R186 R189 R192 R195 R198 R201 R204 R207 R210 R213 R216 R219 R222 R225 R228 R231 R234 R237 R240 R243 R246 R249 R252 R255 R258 R261 R264 R267 R270 R273 R276 R279 R282 R285 R288 R291 R294 R297 R300 = SparkFun-Resistors; PROD_ID: RES-07849
U1-U100 = Local Lirary